# Altium PCB 1.PcbDoc
Units mm, origin at the board's own origin, x right, y up, seen from the top; angles counter-clockwise.
Board outline 120 x 140 mm, 2 copper layers (Top Layer, Bottom Layer); 4 components, 0 nets, 40 pads, 0 vias.
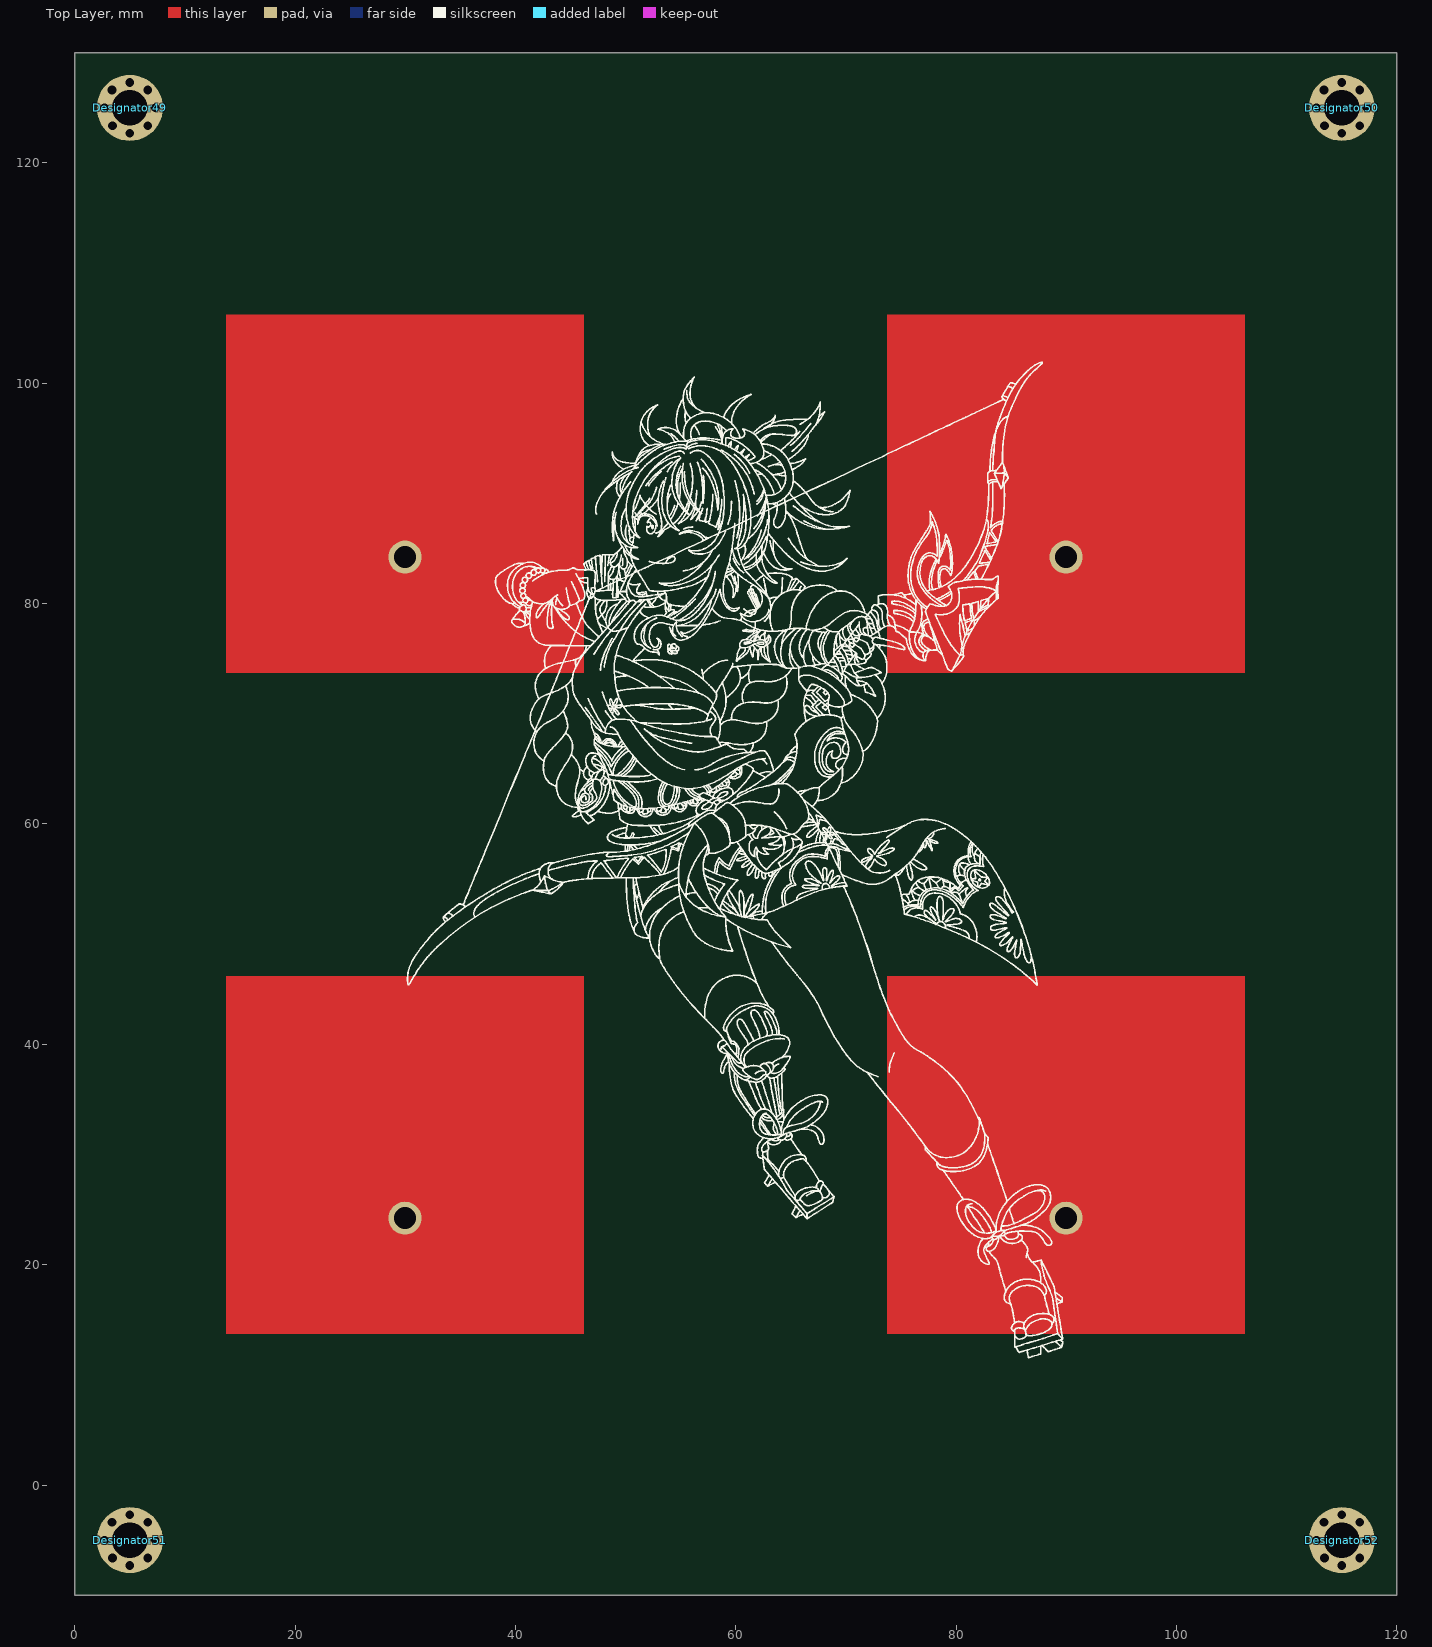
[diagram p0: Top Layer view]
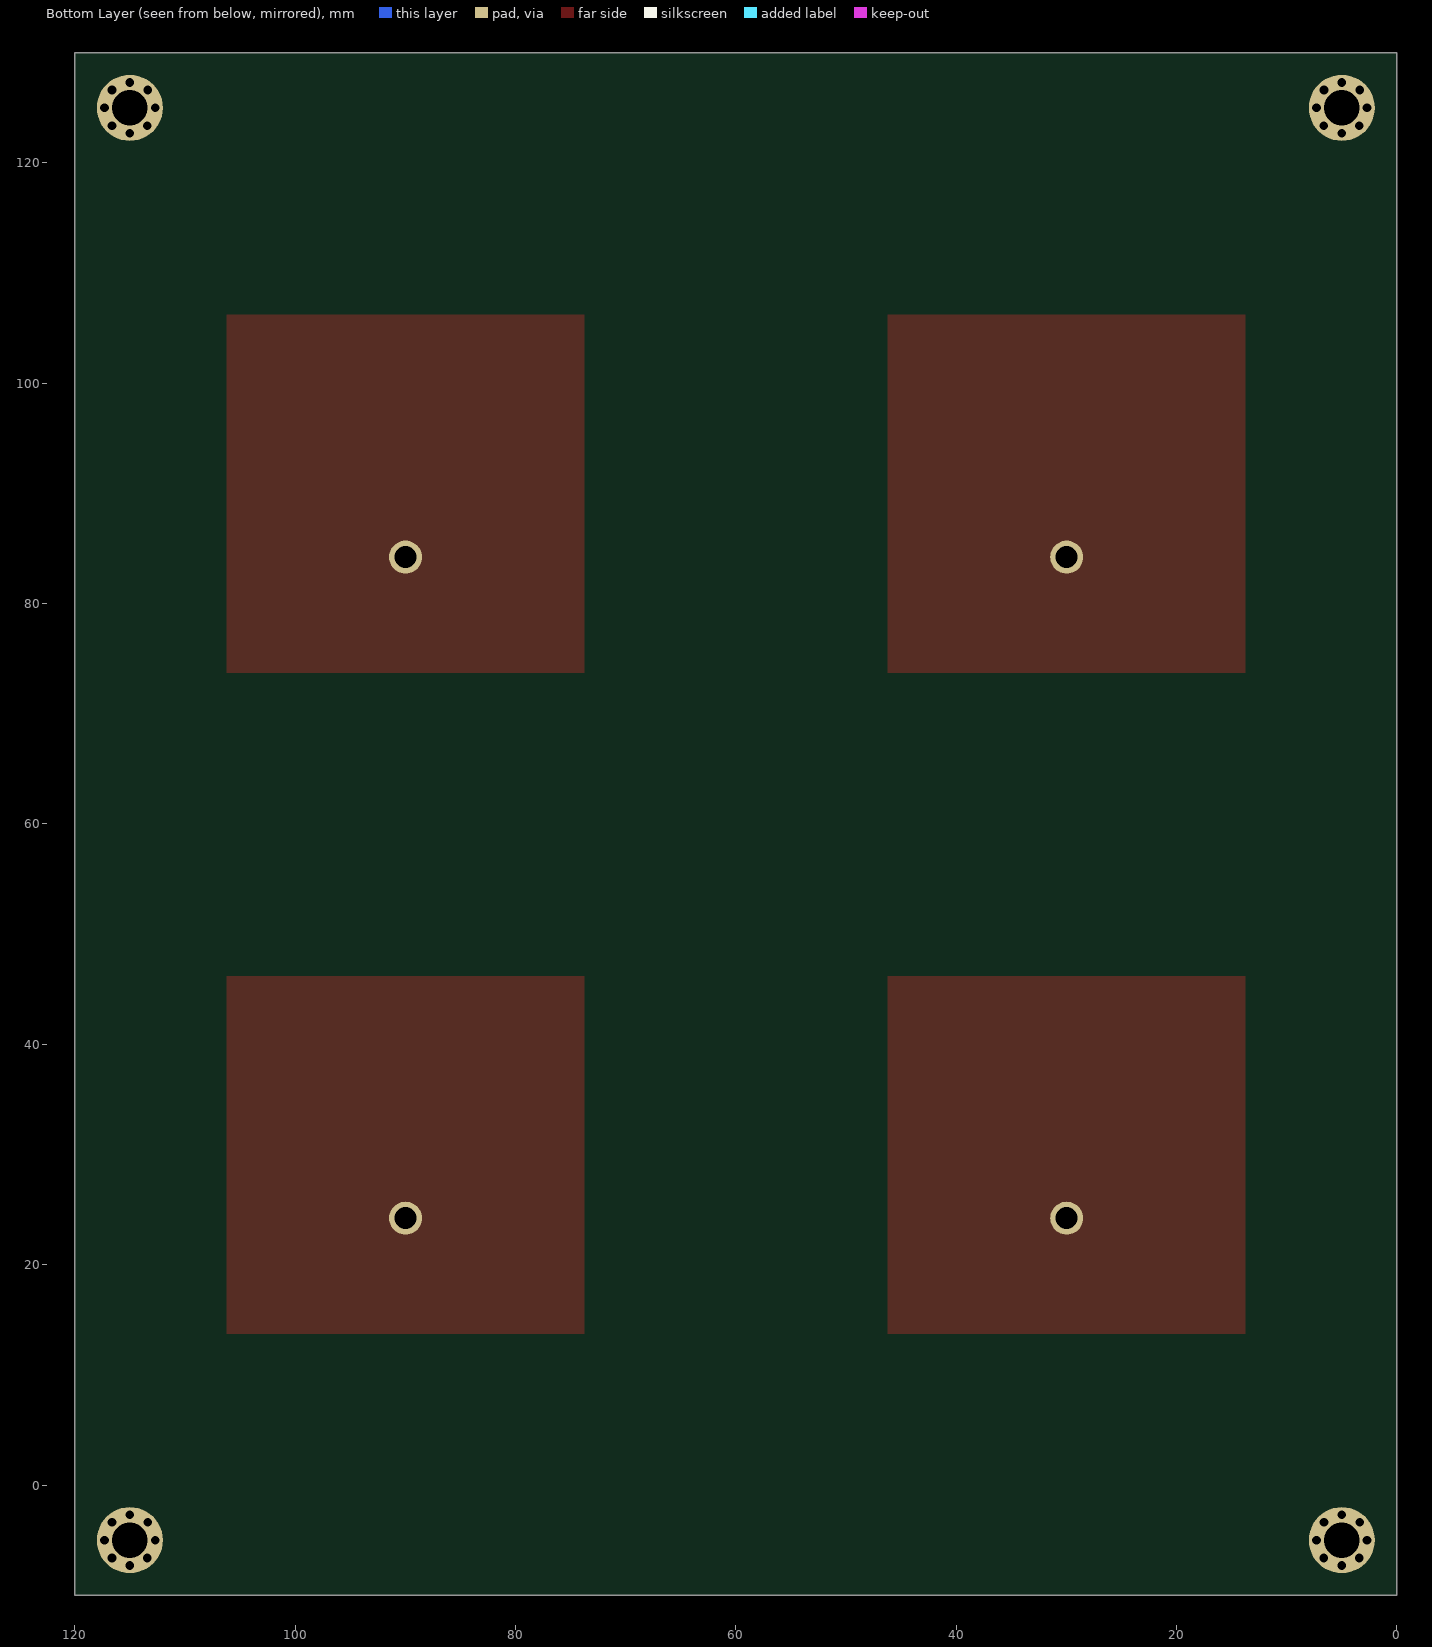
[diagram p1: Bottom Layer view, seen from below]

## Layer stack, top to bottom
Top Solder: solder mask 0.0102, Solder Resist, Dk 3.5
Top Layer: signal copper 0.0356
Dielectric 1: dielectric 0.32, FR-4, Dk 4.8
Bottom Layer: signal copper 0.0356
Bottom Solder: solder mask 0.0102, Solder Resist, Dk 3.5

## Board outline
0,-10 120,-10 120,130 0,130

## Design rules (kind name [scope] priority, off if disabled: settings)
Clearance [All] p1: gap=0.254 ignorepadtopadclearanceinfootprint=FALSE except(0: Arc-Hole Track-Hole SMDPad-Hole THPad-Hole Via-Hole Fill-Hole Poly-Hole Region-Hole Text-Hole)
PolygonConnect [All] p1: connectstyle=Relief reliefconductorwidth=0.254 reliefentries=4 polygonreliefangle="90 Angle" airgapwidth=0.254
RoutingVias [All] p1: holewidth=0.711 width=1.27 viastyle="Through Hole" minholewidth=0.711 minwidth=1.27 maxholewidth=0.711 maxwidth=1.27
SolderMaskExpansion [All] p1: expansion=0.102 istentingtop=FALSE
Width [All] p1: maxlimit=0.254 minlimit=0.254 preferedwidth=0.254
30 further rules are at their usual default settings.

## Components (designator, comment, footprint, x,y, rotation, side; value= is the part's Value field where it differs from the comment)
Designator49 "Comment" 螺丝固定孔M3 5,125 r0 top
Designator50 "Comment" 螺丝固定孔M3 115,125 r0 top
Designator51 "Comment" 螺丝固定孔M3 5,-5 r0 top
Designator52 "Comment" 螺丝固定孔M3 115,-5 r0 top

## Footprints (in the part's own frame and the unit in brackets; to place one, negate y for a bottom-side part, rotate by r counter-clockwise, add the part's x,y. Pads: shape width x height; smd on the part's side, far side on the other; paste and mask are expansions set on the pad)
螺丝固定孔M3 [mm]
  round 1.2 hole 0.8: 1(-2.3,0) 1(-1.62,1.62) 1(-1.578,-1.622) 1(0,-2.3) 1(0,2.3) 1(1.63,1.62) 1(1.632,-1.631) 1(2.3,0)
  round 6 hole 3.2: 1(0,0)

## Free pads (board coordinates)
  round 3 hole 2: 3(29.972,24.222) 3(29.972,84.222) 3(89.972,24.222) 3(89.972,84.222)

## Nets (pads, with @x,y where several pads share a name; then routed paths per layer and width w, separated by ;. In a path a pad name is that pad's centre, name@x,y a point inside that pad or via, vN(x,y) a via of type N, cw(c..) or ccw(c..) an arc to the next point about the centre after c; other vN are vias at no path point)
pads on no net: Designator49.1 Designator50.1 Designator51.1 Designator52.1

## Other copper
Top Layer:
  rectangle: 13.722,13.722 46.222,46.222
  rectangle: 73.722,13.722 106.222,46.222
  rectangle: 73.722,73.722 106.222,106.222
  rectangle: 13.722,73.722 46.222,106.222

## Silkscreen, mask and mechanical layers (free items; w line width, h text height)
Top Overlay:
  drawing of 37125 lines, arcs and shapes, not listed
Bottom Solder:
  rectangle: 0.254,-0.127 120.269,120.015
Mechanical 1:
  the board outline again, w0.254